# Altium PCB Arduino_Nano_Breakout_Board_V1.0.pcbdoc
Units mil, origin at the board's own origin, x right, y up, seen from the top; angles counter-clockwise.
Board outline 3034.88 x 2949.84 mil, 2 copper layers (Top Layer, Bottom Layer); 21 components, 32 nets, 104 pads, 23 vias.
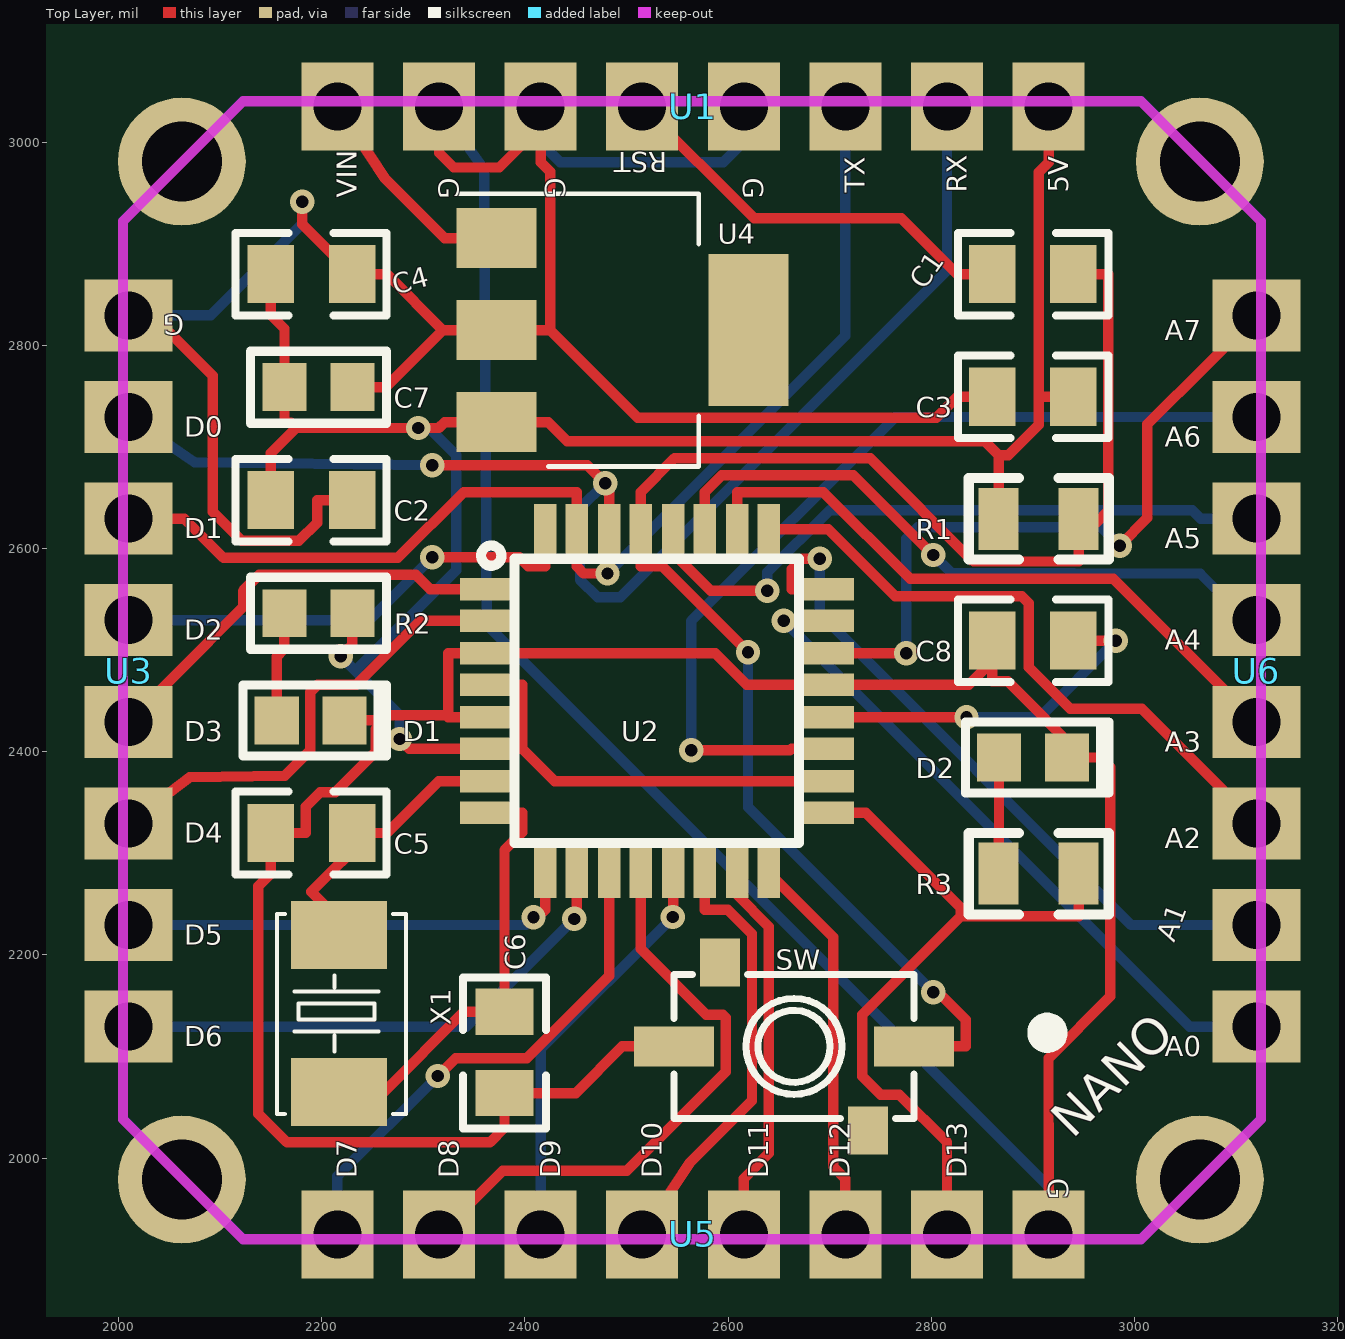
[diagram p0: Top Layer view]
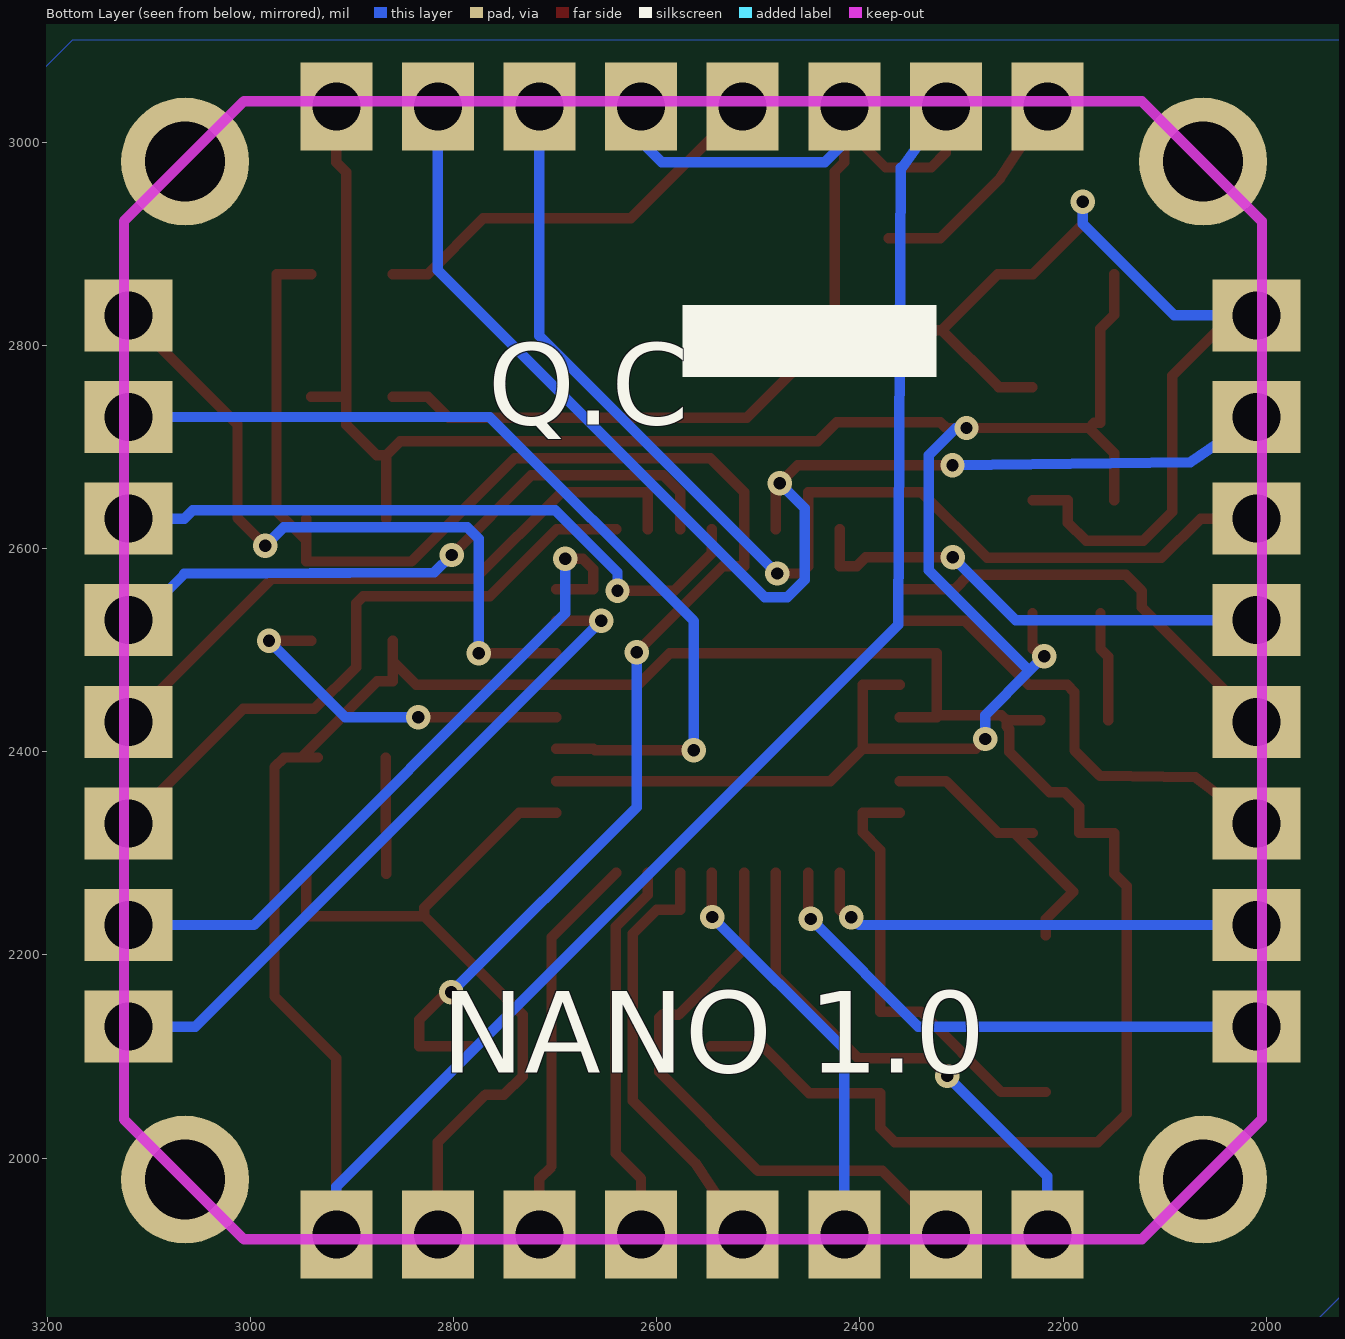
[diagram p1: Bottom Layer view, seen from below]

## Layer stack, top to bottom
Top Layer: signal copper (thickness not stored)
Dielectric: dielectric 12.6, FR-4, Dk 4.8
Bottom Layer: signal copper (thickness not stored)

## Board outline
4034.88,1000 1000,1000 1000,3949.84 4034.88,3949.84

## Components (designator, comment, footprint, x,y, rotation, side; value= is the part's Value field where it differs from the comment)
C1 "0.1uF" 0805#1 2899.92,2870 r180 top
C2 "0.1uF" 0805#1 2189.92,2647.53 r0 top
C3 "4.7uF" 0805#2 2939.93,2749.34 r180 top
C4 "0.1uF" 0805#1 2189.92,2870 r0 top
C5 "22pF" 0805#1 2189.92,2320 r0 top
C6 "22pF" 0805#1 2379.92,2104.06 r90 top
C7 "1uF" C0603 2230.27,2758.77 r180 top
C8 "0.1uF" 0805#1 2899.92,2509.22 r180 top
D1 "Blue LED" "LED 0603" 2155.73,2430.81 r0 top
D2 "Yellow LED" "LED 0603" 2866.62,2394.31 r0 top
R1 "10K" R0805 2905.72,2629.28 r180 top
R2 "1k" R0603 2163.34,2536.3 r0 top
R3 "1K" R0805 2905.73,2280 r0 top
SW "RS-285G05A2-URT" KEY-SMD_RS-285G05A2 2664.92,2110 r0 top
U1 "1*8 HEADER PIN-A" "1*8 HEADER PIN-A" 2215.47,3035 r90 top
U2 "ATMEGA328_TQFP" TQFP32 2529.92,2450 r0 top
U3 "1*8 HEADER PIN-A" "1*8 HEADER PIN-A" 2009.92,2129.45 r180 top
U4 "LM1117IMPX-5.0" SOT-223 2619.92,2815 r0 top
U5 "1*8 HEADER PIN-A" "1*8 HEADER PIN-A" 2915.47,1925 r270 top
U6 "1*8 HEADER PIN-A" "1*8 HEADER PIN-A" 3119.92,2829.45 r0 top
X1 "16MHz" OSC-SMD_2P-L5.0-W3.2 2217.05,2142.24 r90 top

## Footprints (in the part's own frame and the unit in brackets; to place one, negate y for a bottom-side part, rotate by r counter-clockwise, add the part's x,y. Pads: shape width x height; smd on the part's side, far side on the other; paste and mask are expansions set on the pad)
"1*8 HEADER PIN-A" [mm]
  rect 2.2x1.8 hole 1.2: 1(0,0) 2(0,-2.54) 3(0,-5.08) 4(0,-7.62) 5(0,-10.16) 6(0,-12.7) 7(0,-15.24) 8(0,-17.78)
0805#1 [mm]
  rect 1.16x1.45 smd: 1(-1.016,0) 2(1.016,0)
  silkscreen extent -1.9,-1.03 1.87,1.04
0805#2 [mm]
  rect 1.16x1.47 smd: 1(0,0) 2(2.032,0)
  silkscreen extent -0.88,-1.04 2.89,1.04
C0603 [mil]
  rect 43.3x47.2 smd: 1(0,0) 2(66.9,0)
  silkscreen extent -33,-35 100,35
KEY-SMD_RS-285G05A2 [mm]
  rect 2x1 smd: 1(-3,0) 2(3,0)
  rect 1x1.2 smd: 3(-1.85,2.1) 4(1.85,-2.1)
  silkscreen extent -3,-1.8 3,1.8
"LED 0603" [mil]
  rect 43.35x47.2 smd: A(0.03,0)
  rect 43.25x47.2 smd: K(66.88,0)
  silkscreen extent -33,-35 108,35
OSC-SMD_2P-L5.0-W3.2 [mil]
  rect 66.92x94.48 smd: 1(-77.18,0.02) 2(77.18,-0.02)
  silkscreen extent -99,-66 98,61
R0603 [mil]
  rect 43.3x47.2 smd: 1(0,0) 2(66.9,0)
  silkscreen extent -33,-35 100,35
R0805 [mm]
  rect 1x1.55 smd: 1(-1,0) 2(1,0)
  silkscreen extent -1.75,-1.02 1.75,1.02
SOT-223 [mm]
  rect 2x1.5 smd: 1(-6.3,2.3) 2(-6.3,0) 3(-6.3,-2.3)
  rect 2x3.8 smd: 4(0,0)
  silkscreen extent -7.25,-3.41 -1.24,3.41
TQFP32 [mil]
  rect 50x22 smd: 1(-169,110) 2(-169,79) 3(-169,47) 4(-169,16) 5(-169,-16) 6(-169,-47) 7(-169,-79) 8(-169,-110) 17(169,-110) 18(169,-79) 19(169,-47) 20(169,-16) 21(169,16) 22(169,47) 23(169,79) 24(169,110)
  rect 22x50 smd: 9(-110,-169) 10(-79,-169) 11(-47,-169) 12(-16,-169) 13(16,-169) 14(47,-169) 15(79,-169) 16(110,-169) 25(110,169) 26(79,169) 27(47,169) 28(16,169) 29(-16,169) 30(-47,169) 31(-79,169) 32(-110,169)
  silkscreen extent -173,-140 140,153

## Free pads (board coordinates)
  round 125.98 hole 78.74: 1(2062.31,1978.86) 1(2062.31,2980.83) 1(3064.28,1978.86) 1(3064.28,2980.83)

## Via types
v1: diameter 24.02, hole 12.2, Top Layer to Bottom Layer, 23 vias

## Nets (pads, with @x,y where several pads share a name; then routed paths per layer and width w, separated by ;. In a path a pad name is that pad's centre, name@x,y a point inside that pad or via, vN(x,y) a via of type N, cw(c..) or ccw(c..) an arc to the next point about the centre after c; other vN are vias at no path point)
+5V: C2.1 C3.1 C4.1 C7.2 R1.2 R2.2 U1.8 U2.4 U2.6 U2.18 U4.3 | length 2416
  Top Layer w10.24: C2.1 2149.92,2687.6 2149.92,2694 2174.52,2718.6 ; C4.1 2149.92,2829.9 2163.42,2816.5 2163.42,2793.9 C7.2 2163.42,2723.7 2169.42,2723.7 2174.52,2718.6 ; v1(2218.62,2494) 2225.82,2501.2 2230.22,2501.2 R2.2 ; v1(2276.72,2412.5) 2286.22,2403 U2.6 2397.42,2403 ; U2.4 2379.22,2466 2397.42,2466 2397.42,2403 ; U2.18 2429.42,2371 2397.42,2403 ; R1.2@2866.32,2629.3 2866.32,2671.3 2866.32,2691.8 ; U1.8 2915.52,2980.2 2905.62,2970.3 2905.62,2749.3 ; C3.1 2905.62,2749.3 ; 2174.52,2718.6 v1(2295.22,2718.6) 2315.12,2718.6 2321.02,2724.4 U4.3 2397.32,2724.4 2422.82,2724.4 2441.72,2705.5 2852.72,2705.5 2866.32,2691.8 ; 2866.32,2691.8 2875.72,2691.8 2905.62,2721.7 2905.62,2749.3
  Bottom Layer w10.24: v1(2218.62,2494) 2233.22,2479.5 ; v1(2276.72,2412.5) 2276.72,2436 2233.22,2479.5 ; v1(2295.22,2718.6) 2305.72,2718.6 2332.52,2691.8 2332.52,2578.8 2233.22,2479.5
A0: U2.23 U6.8 | length 674.9
  Top Layer w10.24: v1(2654.72,2529) U2.23
  Bottom Layer w10.24: v1(2654.72,2529) 3054.32,2129.4 U6.8
A1: U2.24 U6.7 | length 698.6
  Top Layer w10.24: v1(2690.12,2589.9) 2673.02,2589.9 2662.42,2579.4 2662.42,2560 U2.24
  Bottom Layer w10.24: v1(2690.12,2589.9) 2690.12,2536.1 2996.82,2229.4 U6.7
A2: U2.25 U6.6 | length 636.9
  Top Layer w10.24: U2.25 2698.52,2619 2764.42,2553.1 2889.02,2553.1 2895.82,2546.3 2895.82,2483.2 2936.92,2442.1 3007.22,2442.1 3073.02,2376.4 U6.6
A3: U2.26 U6.5 | length 641.1
  Top Layer w10.24: U2.26 2608.92,2655.5 2693.72,2655.5 2779.12,2570.1 2979.22,2570.1 3073.02,2476.4 U6.5
A4: U2.27 U6.4 | length 645
  Top Layer w10.24: U2.27 2576.92,2655.5 2593.62,2672.2 2723.42,2672.2 v1(2801.92,2593.6)
  Bottom Layer w10: 3064.92,2575 3110.47,2529.45 U6.4
  Bottom Layer w10.24: v1(2801.92,2593.6) 2819.12,2576.4 3064.92,2575
A5: U2.28 U6.3 | length 659.6
  Top Layer w10.24: U2.28 2545.92,2595.5 2582.82,2558.6 v1(2638.72,2558.6)
  Bottom Layer w10.24: v1(2638.72,2558.6) 2638.72,2576.5 2699.92,2637.8 3056.82,2637.8 3065.12,2629.4 U6.3
A6: U2.19 U6.2 | length 902.5
  Top Layer w10.24: v1(2563.72,2401.4) 2660.82,2401.4 2662.42,2403 U2.19
  Bottom Layer w10.24: v1(2563.72,2401.4) 2563.72,2528.7 2764.42,2729.4 U6.2
A7: U2.22 U6.1 | length 693.6
  Top Layer w10.24: U2.22 v1(2775.22,2497) ; v1(2985.42,2602.9) 3012.72,2630.2 3012.72,2722.2 3073.02,2782.5 U6.1
  Bottom Layer w10.24: v1(2775.22,2497) 2775.22,2609.6 2786.72,2621.1 2967.22,2621.1 v1(2985.42,2602.9)
AREF: C8.1 U2.20 | length 355.7
  Top Layer w10.24: U2.20 v1(2834.62,2434) ; C8.1 2974.22,2509.2 v1(2981.72,2509.2)
  Bottom Layer w10.24: v1(2834.62,2434) 2906.52,2434 v1(2981.72,2509.2)
C1_2: C1.2 U1.4 | length 412.7
  Top Layer w10.24: U1.4 2625.52,2925 2770.62,2925 2825.62,2870 C1.2
D0/RX: U1.7 U2.30 U3.7 | length 1305.7
  Top Layer w10.24: v1(2308.92,2682.1) 2461.32,2682.1 v1(2478.92,2664.4) 2482.92,2660.4 U2.30
  Bottom Layer w10.24: U3.7 2074.92,2685 v1(2308.92,2682.1) ; v1(2478.92,2664.4) 2454.22,2639.8 2454.22,2569.2 2471.52,2551.9 2493.72,2551.9 2815.52,2873.7 U1.7
D1/TX: U1.6 U2.31 U3.6 | length 1146.7
  Top Layer w10.24: U3.6 2064.72,2629.4 2103.32,2590.8 2274.92,2590.8 2339.62,2655.5 2450.92,2655.5 U2.31 2450.92,2582.5 2458.02,2575.4 v1(2481.32,2575.4)
  Bottom Layer w10.24: v1(2481.32,2575.4) 2715.52,2809.6 U1.6
D1_A: D1.A R2.1 | length 108.6
  Top Layer w10.24: D1.A@2155.72,2430.8 2155.72,2493.6 2163.32,2501.2 R2.1
D2: U2.32 U3.5 | length 475.9
  Top Layer w10.24: v1(2308.72,2591.4) 2394.42,2591.4 2403.32,2582.5 2419.92,2582.5 U2.32
  Bottom Layer w10.24: U3.5 2246.82,2529.4 v1(2308.72,2591.4)
D2_A: D2.A R3.1 | length 114.4
  Top Layer w10.24: R3.1@2866.32,2280 2866.32,2322 2866.62,2322.3 D2.A@2866.62,2394.3
D3: U2.1 U3.4 | length 426.3
  Top Layer w10.24: U3.4 2056.92,2476.4 2122.52,2542.1 2122.52,2558.2 2138.52,2574.2 2292.72,2574.2 2306.92,2560 2324.42,2560 U2.1
D4: U2.2 U3.3 | length 463.1
  Top Layer w10.24: U3.3 2069.92,2375 2163.82,2376.4 2188.92,2401.5 2188.92,2458.7 2196.12,2465.9 2233.92,2465.9 2297.02,2529 U2.2
D5: U2.9 U3.2 | length 452.8
  Top Layer w10.24: v1(2408.52,2237) 2412.52,2237 2419.92,2244.5 U2.9
  Bottom Layer w10.24: U3.2 2400.92,2229.4 v1(2408.52,2237)
D6: U2.10 U3.1 | length 529.1
  Top Layer w10.24: v1(2448.52,2235.4) 2450.92,2237.8 U2.10
  Bottom Layer w10.24: U3.1 2342.52,2129.4 v1(2448.52,2235.4)
D7: U2.11 U5.8 | length 507.8
  Top Layer w10.24: v1(2314.29,2080.82) 2331.87,2098.4 2401.92,2098.4 2482.92,2179.4 U2.11
  Bottom Layer w10.24: U5.8 2215.52,1982.05 v1(2314.29,2080.82)
D8: U2.12 U5.7 | length 588.8
  Top Layer w10.24: U5.7 2362.42,1971.9 2378.02,1987.6 2500.42,1987.6 2597.72,2084.8 2597.72,2138.2 2594.72,2141.2 2578.62,2141.2 2513.92,2205.9 U2.12
D9: U2.13 U5.6 | length 410
  Top Layer w10.24: v1(2545.42,2237.3) 2545.92,2237.8 U2.13
  Bottom Layer w10.24: U5.6 2415.52,2107.4 v1(2545.42,2237.3)
D10: U2.14 U5.5 | length 428.3
  Top Layer w10.24: U5.5 2562.42,1995.5 2623.52,2056.6 2623.52,2220.9 2599.92,2244.5 2576.92,2244.5 U2.14
D11: U2.15 U5.4 | length 379.2
  Top Layer w10.24: U2.15 2608.92,2259.1 2640.22,2227.8 2640.22,2004.6 2615.52,1979.8 U5.4
D12: U2.16 U5.3 | length 387.3
  Top Layer w10.24: U2.16 2703.62,2217.3 2703.62,1991.7 2715.52,1979.8 U5.3
D13: R3.2 U2.17 U5.2 | length 733.8
  Top Layer w10.24: U2.17 2735.42,2340 2828.92,2246.5 2828.92,2238 ; U5.2 2815.52,2015.6 2768.62,2062.5 2750.42,2062.5 2732.12,2080.7 2732.12,2141.2 2828.92,2238 ; R3.2 2945.12,2238 2828.92,2238
GND: C2.2 C3.2 C4.2 C5.1 C6.1 C7.1 C8.2 D1.K D2.K SW.1 U1.2 U1.3 U1.5 U2.3 U2.5 U2.21 U3.8 U4.2 U5.1 | length 6035.6
  Top Layer w10: U1.2 2315.47,2989.45 2329.92,2975 2374.92,2975 2415.47,3015.55 U1.3
  Top Layer w10.24: U3.8 2009.92,2852.9 2092.62,2770.2 2092.62,2636.1 2121.22,2607.5 2177.52,2607.5 2195.62,2625.5 2195.62,2647.5 C2.2 ; v1(2180.83,2941.45) 2180.83,2919.09 C4.2 2264.32,2870 2319.32,2815 ; D1.K 2255.72,2430.8 ; C7.1 2263.42,2758.8 2263.42,2759.2 2319.32,2815 ; U2.5 2324.42,2434 ; U1.3 2415.52,2980.2 2424.92,2970.8 2424.92,2815 ; SW.1 2495.92,2110 2450.02,2064 2379.92,2064 2379.92,2029.7 2365.72,2015.5 2165.82,2015.5 2137.52,2043.8 2137.52,2267.5 2149.92,2279.9 C5.1 2184.32,2320 2184.32,2345.7 2198.62,2360.1 2213.42,2360.1 2253.22,2399.8 2253.22,2402.8 2253.22,2422.3 2255.72,2424.8 2255.72,2430.8 ; C8.2 C8.2@2859.92,2489.2 ; C3.2 2825.62,2749.3 2804.92,2728.7 2511.22,2728.7 2424.92,2815 ; U5.1 2915.52,1971.9 2915.42,2098.1 2976.32,2159.1 2976.32,2384.6 2966.62,2394.3 D2.K@2950.12,2394.3 ; D2.K D2.K@2950.12,2394.3 ; 2255.72,2430.8 2261.02,2436 2322.42,2436 2324.42,2434 ; 2319.32,2815 U4.2 2424.92,2815 ; 2324.42,2434 2324.42,2497 U2.3 2587.32,2497 2618.32,2466 U2.21 2836.72,2466 C8.2@2859.92,2489.2 ; C8.2@2859.92,2489.2 2859.92,2469.2 2875.22,2469.2 D2.K@2950.12,2394.3
  Bottom Layer w10.24: U3.8 2090.92,2829.5 2180.82,2919.5 v1@2180.82,2941.5 ; U1.2 2358.35,2975 ; 2359.83,2975 2362.42,2525 2915.52,1971.9 U5.1 ; U1.3 2415.52,2999.4 2434.72,2980.2 2595.12,2980.2 2615.42,3000.5 U1.5
RESET: C1.1 R1.1 SW.2 U2.29 | length 1581.6
  Top Layer w10.24: v1(2619.62,2497.9) 2535.12,2582.5 2513.92,2582.5 U2.29 2513.92,2637.2 2513.92,2655.5 2547.22,2688.8 2740.02,2688.8 2841.52,2587.2 2945.12,2587.2 R1.1@2945.12,2608.3 ; SW.2 2833.92,2110 2833.92,2136.1 2806.92,2163.1 v1(2802.12,2163.1) ; C1.1 2974.22,2870 2974.32,2870 2974.32,2637.4 R1.1@2945.12,2608.3 ; R1.1 R1.1@2945.12,2608.3
  Bottom Layer w10.24: v1(2619.62,2497.9) 2619.62,2345.5 v1(2802.12,2163.1)
U2_7: C5.2 U2.7 X1.2 | length 287.6
  Top Layer w10.24: X1.2 2217.07,2234.95 2189.92,2262.1 2247.12,2319.3 C5.2@2247.12,2320 ; C5.2 C5.2@2247.12,2320 ; U2.7 2315.32,2371 2264.32,2320 C5.2@2247.12,2320
U2_8: C6.2 U2.8 X1.1 | length 435.3
  Top Layer w10.24: X1.1 2260.98,2065.06 2339.92,2144 2379.92,2144 2379.92,2303 2397.42,2320.5 2397.42,2340 U2.8
VIN: U1.1 U4.1 | length 218.8
  Top Layer w10.24: U1.1 2262.42,2964.1 2321.02,2905.5 U4.1@2371.92,2905.5
pads on no net: SW.3 SW.4 U4.4

## Polygon pours and split planes (outlines as drawn)
GND on Top Layer (solid): 1860.35,3150.51 3260.35,3150.51 3305.23,3105.62 3305.23,1865.47 3205.23,1765.47 1975.31,1765.47 1840.27,1900.51 1840.27,3140.27 1865.47,3165.47
GND on Bottom Layer (solid): 1840.27,3100.51 3175.31,3100.51 3280.43,2995.39 3280.43,1865.86 3170.19,1755.63 2015.08,1755.63 1970.19,1800.51 1970.19,1820.59 1815.47,1975.31 1815.47,3050.51 1825.31,3060.35

## Silkscreen, mask and mechanical layers (free items; w line width, h text height)
Top Overlay:
  circle w19.68: c2914.29,2123.34 r10
  text "RST" at 2539.92,2989.84 h19.68 r180
  text "G" at 2315.08,2965 h19.68 r270
  text "G" at 2420.08,2965 h19.68 r270
  text "G" at 2615.08,2965 h19.68 r270
  text "TX" at 2734.76,2950 h19.68 r90
  text "RX" at 2834.76,2950 h19.68 r90
  text "5V" at 2934.76,2950 h19.68 r90
  text "VIN" at 2234.76,2945 h19.68 r90
  text "G" at 2064.92,2829.84 h19.68 r180
  text "A7" at 3029.92,2805.16 h19.68
  text "D0" at 2064.92,2710.16 h19.68
  text "A6" at 3029.92,2700.16 h19.68
  text "D1" at 2064.92,2610.16 h19.68
  text "A5" at 3029.92,2600.16 h19.68
  text "D2" at 2064.92,2510.16 h19.68
  text "A4" at 3029.92,2500.16 h19.68
  text "D3" at 2064.92,2410.16 h19.68
  text "A3" at 3029.92,2400.16 h19.68
  text "D4" at 2064.92,2310.16 h19.68
  text "A2" at 3029.92,2305.16 h19.68
  text "A1" at 3039.11,2211.47 h19.68 r69
  text "D5" at 2064.92,2210.16 h19.68
  text "D6" at 2064.92,2110.16 h19.68
  text "A0" at 3029.92,2100.16 h19.68
  text "NANO" at 2939.42,2018.29 h35.43 r45
  text "D7" at 2234.76,1980 h19.68 r90
  text "D8" at 2334.76,1980 h19.68 r90
  text "D9" at 2434.76,1980 h19.68 r90
  text "D10" at 2534.76,1980 h19.68 r90
  text "D11" at 2639.76,1980 h19.68 r90
  text "D12" at 2719.76,1980 h19.68 r90
  text "D13" at 2834.76,1980 h19.68 r90
  text "G" at 2915.08,1980 h19.68 r270
Bottom Overlay:
  rectangle: 2324.53,2769.01 2574.53,2839.88
  text "Q.C" at 2766.26,2721.93 h80
  text "NANO 1.0" at 2812.19,2083.78 h80